# Altium PCB Attempt 2 - ClassD.PcbDoc (part 1 of 2)
Units mm, origin at the board's own origin, x right, y up, seen from the top; angles counter-clockwise.
Board outline 106 x 65 mm, 2 copper layers (Top Layer, Bottom Layer), stack 1.569 mm thick; 59 components, 29 nets, 154 pads, 172 vias.
Unrouted connection lines stored in the file: 2.
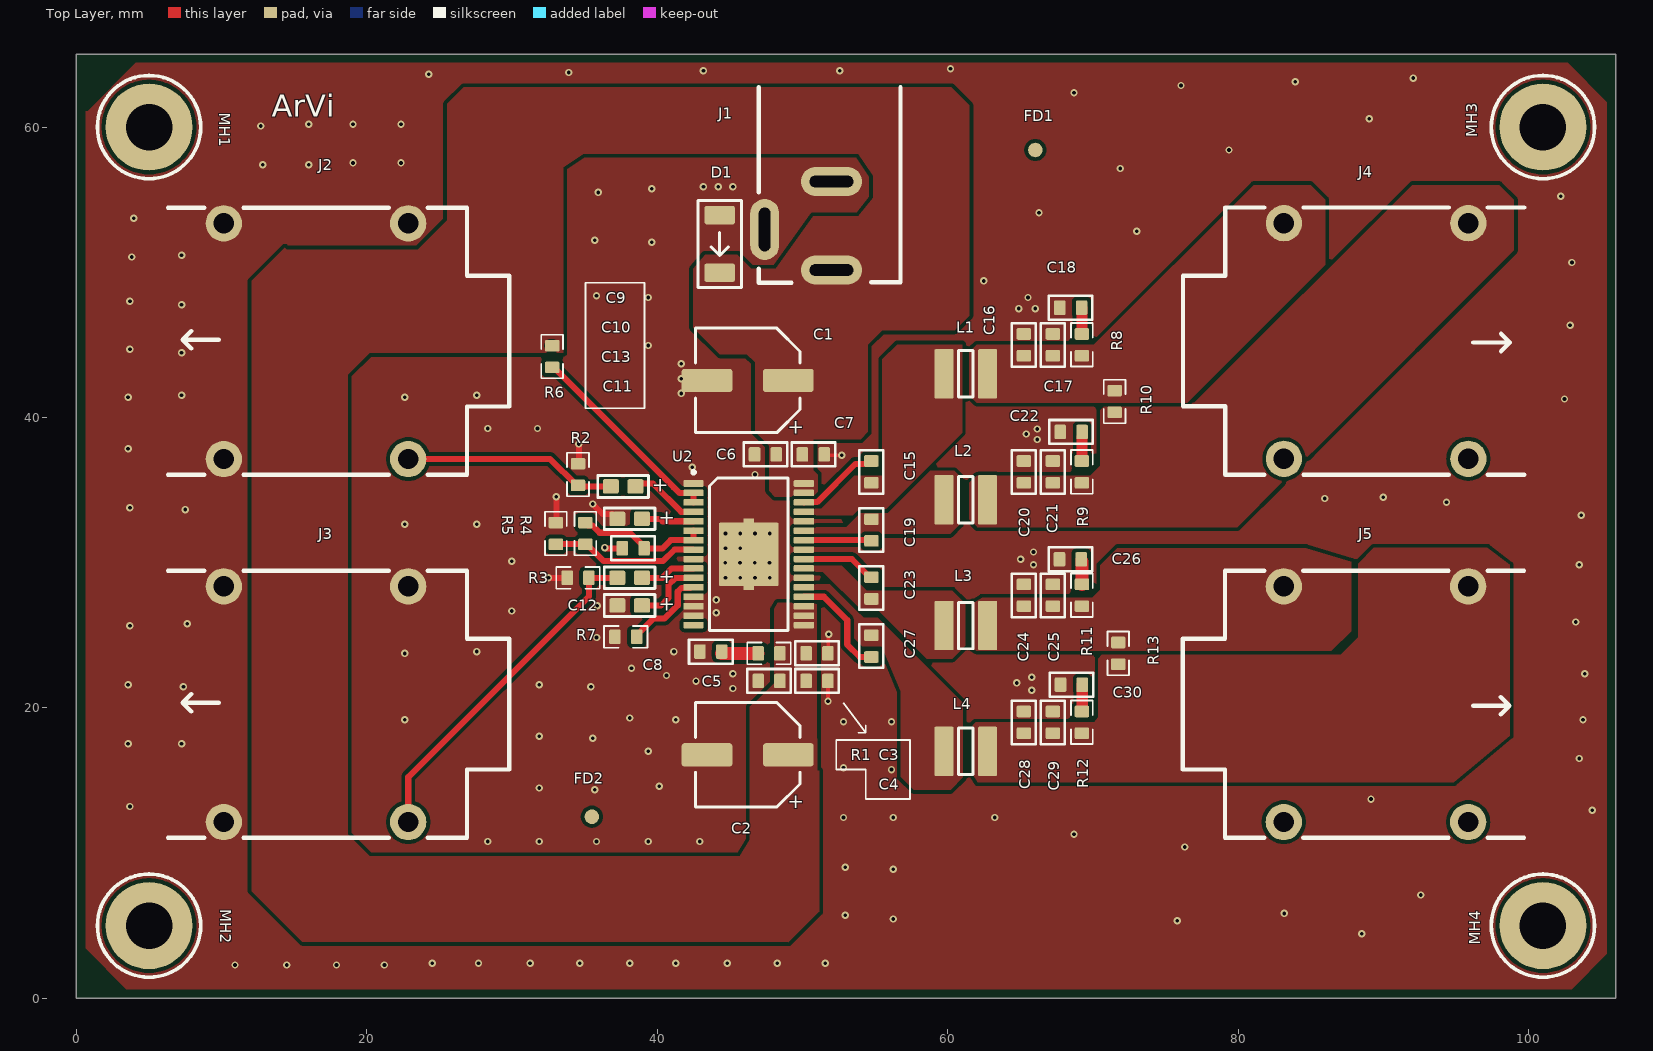
[diagram p0: Top Layer view]
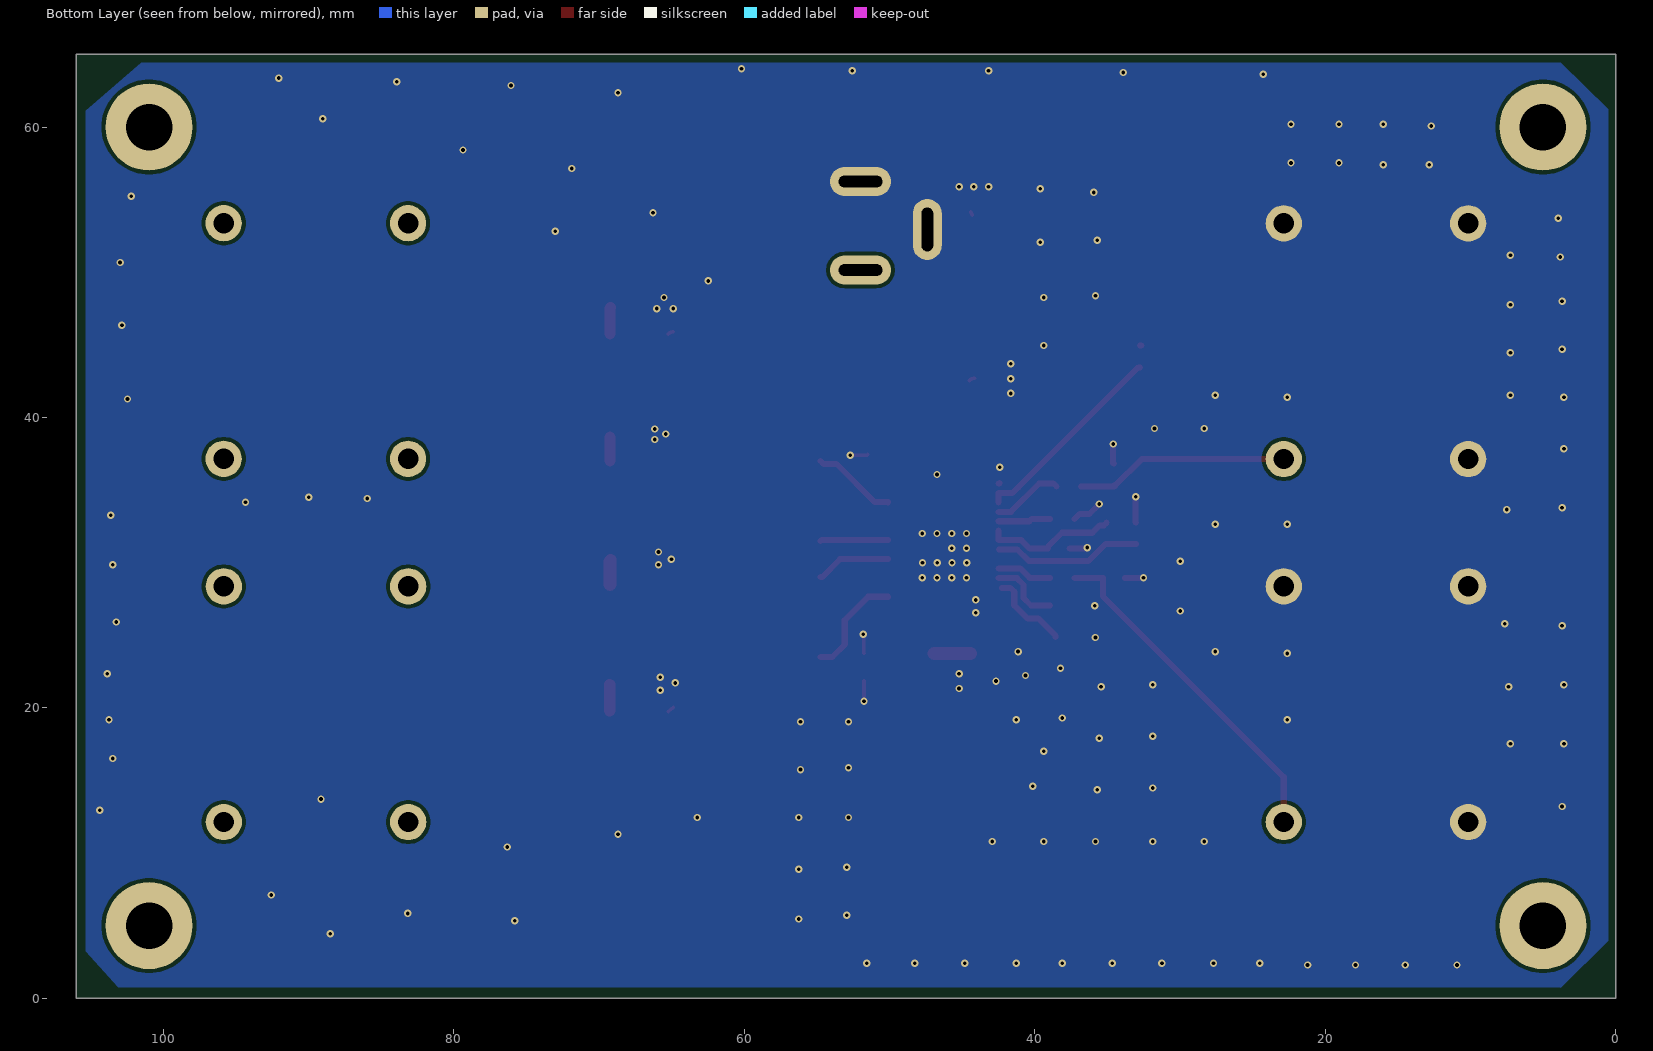
[diagram p1: Bottom Layer view, seen from below]
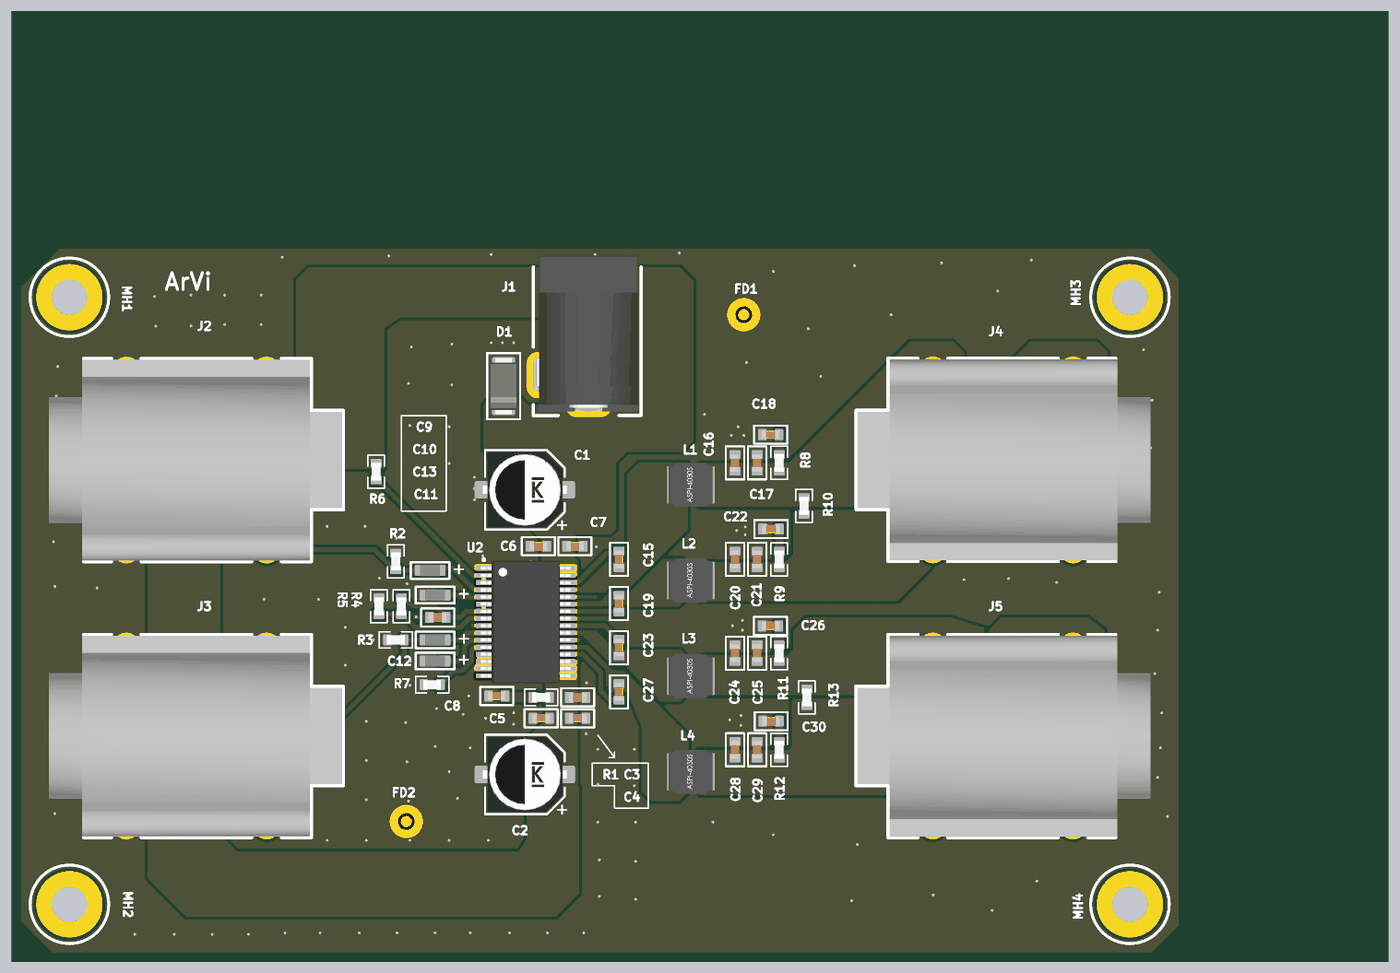
[diagram p3: 3D render of the assembled board from above, using the file's embedded part models]

## Layer stack, top to bottom
Top Solder: solder mask 0.0254, SM-001, Dk 4
Top Layer: signal copper 0.035
Dielectric 1: core 1.4986, Core-043, Dk 4.3
Bottom Layer: signal copper 0.035
Bottom Solder: solder mask 0.0254, SM-001, Dk 4

## Board outline
0,0 0,65 106,65 106,0

## Design rules (kind name [scope] priority, off if disabled: settings)
BoardOutlineClearance [All] p1: gap=0.508 ignorepadtopadclearanceinfootprint=FALSE
Clearance [All] p1: gap=0.254 ignorepadtopadclearanceinfootprint=FALSE except(0: Arc-Hole Track-Hole SMDPad-Hole THPad-Hole Via-Hole Fill-Hole Poly-Hole Region-Hole Text-Hole; 0.178: Arc-SMDPad Track-SMDPad SMDPad-SMDPad; 0.229: Arc-Arc Arc-Track Track-Track)
HoleSize [All] p1: absolutevalues=TRUE maxlimit=2286 minlimit=0.025 maxpercent=80.000 minpercent=20.000
PlaneConnect [All] p1: planeconnectstyle=Direct reliefexpansion=0.508 reliefentries=4 reliefconductorwidth=0.254 reliefairgap=0.254
PolygonConnect PolygonConnect_via [IsVia] p1: connectstyle=Direct reliefconductorwidth=0.254 reliefentries=4 polygonreliefangle="90 Angle" airgapwidth=0.254
PolygonConnect [All] p2: connectstyle=Direct reliefconductorwidth=0.254 reliefentries=4 polygonreliefangle="90 Angle" airgapwidth=0.254
RoutingVias [All] p1: holewidth=0.254 width=0.508 viastyle="Through Hole" minholewidth=0.254 minwidth=0.508 maxholewidth=0.254 maxwidth=0.508
SilkToSolderMaskClearance [IsPad] p1: minsilkscreentomaskgap=0.127 clearancetoexposedcopper=TRUE
SolderMaskExpansion [IsVia] p1: expansion=0.102 istentingtop=TRUE useseparateexpansions=TRUE expansionbottom=0.102 istentingbottom=TRUE
Width [All] p1: maxlimit=1.27 minlimit=0.254 preferedwidth=0.254
27 further rules are at their usual default settings.

## Components (designator, comment, footprint, x,y, rotation, side; value= is the part's Value field where it differs from the comment)
C1 "220u" CAP_AE_SMD_D6MM3_H8MM 46.228,42.55 r180 top
C2 "220u" CAP_AE_SMD_D6MM3_H8MM 46.228,16.764 r180 top
C3 "220n" CAP_0603 51,23.75 r180 top
C4 "220n" CAP_0603 51,21.85 r180 top
C5 "220n" CAP_0603 47.7,21.85 r0 top
C6 "220n" CAP_0603 47.45,37.45 r0 top
C7 "220n" CAP_0603 50.75,37.45 r180 top
C8 "220n" CAP_0603 43.688,23.876 r0 top
C9 "1u" CAP_TANT_0603 37.65,35.25 r180 top
C10 "1u" CAP_TANT_0603 38.1,33.02 r180 top
C11 "1u" CAP_TANT_0603 38.1,28.956 r180 top
C12 "1u" CAP_TANT_0603 38.1,27.051 r180 top
C13 "1u" CAP_0603 38.342,30.988 r180 top
C15 "220n" CAP_0603 54.75,36.25 r90 top
C16 "1u" CAP_0603 65.25,45 r90 top
C17 "1n" CAP_0603 67.25,45 r90 top
C18 "10n" CAP_0603 68.474,47.557 r180 top
C19 "220n" CAP_0603 54.75,32.25 r270 top
C20 "1u" CAP_0603 65.25,36.25 r270 top
C21 "1n" CAP_0603 67.25,36.25 r270 top
C22 "10n" CAP_0603 68.508,38.999 r0 top
C23 "220n" CAP_0603 54.75,28.25 r90 top
C24 "1u" CAP_0603 65.25,27.75 r90 top
C25 "1n" CAP_0603 67.25,27.75 r90 top
C26 "10n" CAP_0603 68.453,30.226 r180 top
C27 "220n" CAP_0603 54.75,24.25 r270 top
C28 "1u" CAP_0603 65.25,19 r270 top
C29 "1n" CAP_0603 67.25,19 r270 top
C30 "10n" CAP_0603 68.523,21.593 r0 top
D1 "D_SMA" "DO-214AC-2 (SMA)" 44.3,51.95 r270 top
FD1 "FD" FIDUCIAL 66.04,58.42 r0 top
FD2 "FD" FIDUCIAL 35.5,12.5 r0 top
J1 "CON-SOCJ-2155" CON-SOCJ-2155 52,56.25 r180 top
J2 "NMJ4HCD2" NMJ4HCD2 16.5,45.25 r180 top
J3 "NMJ4HCD2" NMJ4HCD2 16.5,20.25 r180 top
J4 "NMJ4HCD2" NMJ4HCD2 89.51,45.263 r0 top
J5 "NMJ4HCD2" NMJ4HCD2 89.5,20.25 r0 top
L1 "10u" ASPI-4030S 61.25,43 r0 top
L2 "10u" ASPI-4030S 61.25,34.333 r0 top
L3 "10u" ASPI-4030S 61.25,25.667 r0 top
L4 "10u" ASPI-4030S 61.25,17 r0 top
MH1 "MH" MH-M3 5,60 r90 top
MH2 "MH" MH-M3 5,5 r90 top
MH3 "MH" MH-M3 101,60 r90 top
MH4 "MH" MH-M3 101,5 r90 top
R1 "3R3" RES_0603 47.7,23.75 r0 top
R2 "47k" RES_0603 34.544,36.068 r270 top
R3 "47k" RES_0603 34.544,28.956 r0 top
R4 "47k" RES_0603 35.052,32.004 r270 top
R5 "5k6" RES_0603 33.02,32.004 r90 top
R6 "47k" RES_0603 32.766,44.196 r270 top
R7 "47k" RES_0603 37.834,24.892 r180 top
R8 "3R3" RES_0603 69.25,45 r270 top
R9 "3R3" RES_0603 69.25,36.25 r90 top
R10 "47k" RES_0603 71.5,41.1 r90 top
R11 "3R3" RES_0603 69.25,27.75 r270 top
R12 "3R3" RES_0603 69.25,19 r90 top
R13 "47k" RES_0603 71.75,23.75 r90 top
U2 "TPA3130D2DAPR" TSSOP32-DAP 46.3,30.575 r0 top

## Footprints (in the part's own frame and the unit in brackets; to place one, negate y for a bottom-side part, rotate by r counter-clockwise, add the part's x,y. Pads: shape width x height; smd on the part's side, far side on the other; paste and mask are expansions set on the pad)
ASPI-4030S [mm]
  rrect10% 1.3x3.4 smd: 1(-1.5,0) 2(1.5,0)
  silkscreen extent -0.5,-1.6 0.5,1.6, body extent -2,-2 2,2, height 3.01
CAP_0603 [mm]
  rrect25% 0.8x1 smd: 1(-0.75,0) 2(0.75,0)
  silkscreen extent -1.5,-0.82 1.5,0.82, body extent -0.8,-0.4 0.8,0.4, height 0.51
CAP_AE_SMD_D6MM3_H8MM [mm]
  rrect25% 3.5x1.6 smd: 1(-2.8,0) 2(2.8,0)
  silkscreen extent -3.6,-3.6 3.6,3.6, body extent -3.8,-3.4 3.8,3.4, height 8.02
CAP_TANT_0603 [mm]
  rrect25% 1.1x1 smd: A(-0.85,0) K(0.85,0)
  silkscreen extent -1.75,-0.75 1.75,0.75, body extent -0.9,-0.53 0.9,0.53, height 0.91
CON-SOCJ-2155 [mm]
  oval 4.2x2 hole 0.8 slot 3 at 0 deg: 1(0,6.1) 2(0,0)
  oval 2x4.2 hole 0.8 slot 3 at 90 deg: 3(4.6,3.3)
  silkscreen extent -4.75,-6.5 5,6.98, body extent -4.5,-7.5 4.75,6.6, height 11.11
"DO-214AC-2 (SMA)" [mm]
  rrect25% 1.27x2.1 smd: A(-1.985,0) K(1.985,0)
  silkscreen extent -3,-1.5 3,1.5, body extent -2.6,-1.3 2.6,1.3, height 2.42
FIDUCIAL [mm] "Fiducial"
  round 1 smd paste-1 mask+1: FM(0,0)
MH-M3 [mm] "Mounting Hole"
  round 6 hole 3.2: MH(0,0)
  silkscreen extent -3.55,-3.55 3.55,3.55
NMJ4HCD2 [mm]
  round 2.5 hole 1.4: S(6.35,8.115) SN(6.35,-8.115) T(-6.35,8.115) TN(-6.35,-8.115)
  silkscreen extent -13.3,-9.2 10.2,9.2, body extent -13.18,-9.1 13.35,9.1, height 15.68
RES_0603 [mm]
  rrect25% 0.8x1 smd: 1(-0.75,0) 2(0.75,0)
  silkscreen extent -1.5,-0.75 1.5,0.75, body extent -0.8,-0.43 0.8,0.43, height 0.52
TSSOP32-DAP [mm] "TSOP, 32-Leads, Body 11.00x6.10mm, Pitch 0.65mm, IPC Medium Density"
  rrect25% 1.4x0.45 smd mask+0.14: 1(-3.8,4.875) 2(-3.8,4.225) 3(-3.8,3.575) 4(-3.8,2.925) 5(-3.8,2.275) 6(-3.8,1.625) 7(-3.8,0.975) 8(-3.8,0.325) 9(-3.8,-0.325) 10(-3.8,-0.975) 11(-3.8,-1.625) 12(-3.8,-2.275) 13(-3.8,-2.925) 14(-3.8,-3.575) 15(-3.8,-4.225) 16(-3.8,-4.875) 17(3.8,-4.875) 18(3.8,-4.225) 19(3.8,-3.575) 20(3.8,-2.925) 21(3.8,-2.275) 22(3.8,-1.625) 23(3.8,-0.975) 24(3.8,-0.325) 25(3.8,0.325) 26(3.8,0.975) 27(3.8,1.625) 28(3.8,2.275) 29(3.8,2.925) 30(3.8,3.575) 31(3.8,4.225) 32(3.8,4.875)
  rrect5% 0.7x0.3 smd mask+0.14: 33(0,-2.325) 33(0,2.325)
  rrect5% 4.11x4.36 smd mask+0.14: 33(0,0)
  silkscreen extent -3.9,-5.25 2.7,5.75, body extent -4.05,-5.55 4.05,5.55, height 1.15

## Part data
C1 C2: library part CAP_ALEL_D6MM3_H8MM, "Capacitor SMD Aluminium Electrolytic 6.3mm Diameter 8mm Height", LCSC=C340768, Manufacturer=Nichicon, Manufacturer Part Number=UCM1E221MCL1GS, Distributor Link=https://www.lcsc.com/product-detail/Aluminum-Electrolytic-Capacitors-SMD_Nichicon-UCM1E221MCL1GS_C340768.html
C3 C4 C5 C6 C7 C8 C15 C19 C23 C27: library part CAP_0603, "Capacitor SMD 0603", LCSC=C21120, Manufacturer=Samsung, Manufacturer Part Number=CL10B224KA8NNNC, Rating=25V, Distributor Link=https://www.lcsc.com/product-detail/Multilayer-Ceramic-Capacitors-MLCC-SMD-SMT_Samsung-Electro-Mechanics-CL10B224KA8NNNC_C21120.html
C9 C10 C11 C12: library part CAP_TANT_0603, "Capacitor SMD Tantalum 0603", LCSC=C1952840, Manufacturer=Vishay, Manufacturer Part Number=298D105X0025M2T, Distributor Link=https://www.lcsc.com/product-detail/Tantalum-Capacitors_Vishay-Intertech-298D105X0025M2T_C1952840.html
C13 C16 C20 C24 C28: library part CAP_0603_1, "Capacitor SMD 0603", LCSC=C15849, Manufacturer=Samsung, Manufacturer Part Number=CL10A105KB8NNNC, Rating=50V, Distributor Link=https://www.lcsc.com/product-detail/Multilayer-Ceramic-Capacitors-MLCC-SMD-SMT_Samsung-Electro-Mechanics-CL10A105KB8NNNC_C15849.html
C17 C21 C25 C29: library part CAP_0603_2, "Capacitor SMD 0603", LCSC=C1588, Manufacturer=Samsung, Manufacturer Part Number=CL10B102KB8NNNC, Rating=50V, Distributor Link=https://www.lcsc.com/product-detail/Multilayer-Ceramic-Capacitors-MLCC-SMD-SMT_Samsung-Electro-Mechanics-CL10B102KB8NNNC_C1588.html
C18 C22 C26 C30: library part CAP_0603_3, "Capacitor SMD 0603", LCSC=C57112, Manufacturer=FH, Manufacturer Part Number=0603B103K500NT, Rating=50V, Distributor Link=https://www.lcsc.com/product-detail/Multilayer-Ceramic-Capacitors-MLCC-SMD-SMT_FH-Guangdong-Fenghua-Advanced-Tech-0603B103K500NT_C57112.html
D1: "Diode SMD SMA (DO-214AA)"
FD1 FD2: "Fidicuial"
J1: "DC Barrell Jack 2.1mm 30V 2.5A THT", Manufacturer=Gravitech, Distributor Link=https://www.mouser.de/ProductDetail/Gravitech/CON-SOCJ-2155?qs=fkzBJ5HM%252BdCcpvFQyQZHtA%3D%3D&_gl=1*ni0d5y*_ga*MjU5MDE1MzgyLjE2NTQ4NDcxMjU.*_ga_15W4STQT4T*MTY5Njc2NjEwNi4yNTkuMS4xNjk2NzY2MTE4LjQ4LjAuMA..*_ga_1KQLCYKRX3*MTY5NTYzNTI2NS4xODkuMS4xNjk1NjM1MjcxLjU0LjAuMA.., Manufacturer Part Number=CON-SOCJ-2155
J2 J3 J4 J5: "1/4\" Mono Jack, TS Switched", Manufacturer=Neutrik, Distributor Link=https://www.mouser.de/ProductDetail/Neutrik/NMJ4HCD2?qs=SzdD80gJ2cAr9Xh3wJi7nw%3D%3D, Manufacturer Part Number=NMJ4HCD2
L1 L2 L3 L4: library part ASPI-4030S, "Power Inductor SMD ASPI-4030S Series", LCSC=C2050513, Manufacturer=ABRACON, Manufacturer Part Number=ASPI-4030S-100M-T, Distributor Link=https://www.lcsc.com/product-detail/Power-Inductors_Abracon-LLC-ASPI-4030S-100M-T_C2050513.html
MH1 MH2 MH3 MH4: library part MH-M3, "Mounting Hole M3"
R1 R8 R9 R11 R12: library part RES_0603_1, "Resistor SMD 0603", LCSC=C137627, Manufacturer=YAGEO, Manufacturer Part Number=RC0603JR-073R3L, Distributor Link=https://www.lcsc.com/product-detail/Chip-Resistor-Surface-Mount_YAGEO-RC0603JR-073R3L_C137627.html
R2 R3 R4 R6 R7 R10 R13: library part RES_0603, "Resistor SMD 0603", LCSC=C25819, Manufacturer=UNI-ROYAL, Manufacturer Part Number=0603WAF4702T5E, Distributor Link=https://www.lcsc.com/product-detail/Chip-Resistor-Surface-Mount_UNI-ROYAL-Uniroyal-Elec-0603WAF4702T5E_C25819.html
R5: library part RES_0603_2, "Resistor SMD 0603", LCSC=C23189, Manufacturer=UNI-ROYAL, Manufacturer Part Number=0603WAF5601T5E, Distributor Link=https://www.lcsc.com/product-detail/Chip-Resistor-Surface-Mount_UNI-ROYAL-Uniroyal-Elec-0603WAF5601T5E_C23189.html
U2: "2x15W Filter-Free Class-D Stereo Amplifier With AM Avoidance", LCSC=C95206, Manufacturer="Texas Instruments", Distributor Link=https://www.lcsc.com/product-detail/Audio-Power-OpAmps_Texas-Instruments-TPA3130D2DAPR_C95206.html, Manufacturer Part Number=TPA3130D2DAPR

## Via types
v1: diameter 0.508, hole 0.254, Top Layer to Bottom Layer, tented both sides, 172 vias

## Nets (pads, with @x,y where several pads share a name; then routed paths per layer and width w, separated by ;. In a path a pad name is that pad's centre, name@x,y a point inside that pad or via, vN(x,y) a via of type N, cw(c..) or ccw(c..) an arc to the next point about the centre after c; other vN are vias at no path point)
15V_RC: C8.2 R1.1 | length 2.5
  Top Layer w0.889: C8.2@44.438,23.75 R1.1@46.95,23.75
+15V: C1.1 C2.1 C3.2 C4.2 C5.2 C6.2 C7.2 D1.K J1.1 R1.2 R6.1 U2.17 U2.18 U2.19 U2.31 U2.32 | length 0.1
  Top Layer w0.417: R6.1@32.666,44.946 R6.1@32.766,44.946
FAULTZ_SDZ: R6.2 U2.2 U2.3 | length 14
  Top Layer w0.417: R6.2@32.766,43.446 32.866,43.446 41.133,35.179 41.148,35.179 41.527,34.8 U2.2@42.5,34.8 U2.3@42.5,34.15
GAIN_SLV: R4.2 R5.1 U2.8 | length 10.3
  Top Layer w0.417: R5.1@33.037,31.271 35.141,31.271 35.141,31.265 35.344,31.062 35.35,31.062 35.663,30.749 35.663,30.741 36.303,30.102 40.391,30.102 41.189,30.9 U2.8@42.473,30.9
GND: C1.2 C2.2 C3.1 C4.1 C5.1 C6.1 C7.1 C8.1 C10.K C12.K C13.2 C16.2 C17.2 C18.2 C20.1 C21.1 C22.1 C24.2 C25.2 C26.2 C28.1 C29.1 C30.1 D1.A J1.2 J1.3 J2.S J2.SN J2.TN J3.S J3.SN J3.TN R2.1 R3.1 R5.2 R7.2 U2.1 U2.9 U2.13 U2.14 U2.15 U2.22 U2.25 U2.28 U2.33 | length 13.5
  Top Layer w0.254: J2.S@10.15,37.135 J2.S@10.18,37.105 ; C1.2@44.138,42.7 cw(c44.138,42.188) C1.2@44.5,42.55 ; D1.A@44.3,53.935 ccw(c44.059,54.176) D1.A@44.4,54.176 ; C7.1@51.5,37.45 51.55,37.4 v1(52.7,37.4) ; C4.1@51.75,21.85 51.757,21.843 51.757,20.46 v1(51.764,20.453) ; C3.1@51.75,23.75 51.781,23.781 51.781,25.031 v1(51.813,25.063) ; J1.2@52,56.25 J1.2@52.07,56.18 ; C16.2@64.888,45.9 cw(c64.888,45.388) C16.2@65.25,45.75 ; C28.1@64.9,20.023 C28.1@65.25,19.75
  Top Layer w0.417: v1(32.512,28.956) R3.1@33.794,28.956 ; R5.2@33.02,32.754 33.048,32.782 v1(33.048,34.548) ; R2.1@34.544,36.818 34.604,36.878 v1(34.604,38.168) ; v1(35.56,34.036) 36.232,33.364 36.906,33.364 C10.K@37.25,33.02 ; v1(36.38,31.038) ccw(c36.5,31.159) 36.5,30.988 C13.2@37.592,30.988 ; U2.1@42.418,35.467 42.435,35.45 U2.1@42.5,35.45
  other v1: 10.922,2.286 14.478,2.286 17.907,2.286 21.209,2.286 24.511,2.413 27.686,2.413 31.242,2.413 34.671,2.413 38.1,2.413 41.275,2.413 44.831,2.413 48.26,2.413 51.562,2.413 88.519,4.445 75.819,5.334 56.261,5.461 52.959,5.715 83.185,5.842 92.583,7.112 56.261,8.89 52.959,9.017 76.327,10.414 28.321,10.795 31.877,10.795 35.814,10.795 39.37,10.795 42.926,10.795 68.707,11.303 52.832,12.446 56.261,12.446 63.246,12.446 104.394,12.954 3.683,13.208 89.154,13.716 35.687,14.351 31.877,14.478 40.132,14.605 56.134,15.748 52.832,15.875 103.505,16.51 39.37,17.018 3.556,17.526 7.239,17.526 35.56,17.907 31.877,18.034 52.832,19.05 56.134,19.05 22.606,19.177 41.275,19.177 103.759,19.177 38.1,19.304 65.786,21.209 45.212,21.336 7.366,21.463 35.433,21.463 3.556,21.59 31.877,21.59 64.77,21.717 42.672,21.844 65.786,22.098 40.64,22.225 45.212,22.352 103.886,22.352 38.227,22.733 22.606,23.749 27.559,23.876 41.148,23.876 35.822,24.842 3.683,25.654 7.62,25.781 103.251,25.908 44.069,26.543 29.972,26.67 35.875,27.03 44.069,27.432 44.704,28.956 45.72,28.956 46.736,28.956 47.752,28.956 65.913,29.845 103.505,29.845 44.686,30.003 45.702,30.003 46.718,30.003 47.734,30.003 29.972,30.099 65.024,30.226 65.913,30.734 44.704,30.988 45.72,30.988 44.704,32.004 45.72,32.004 46.736,32.004 47.752,32.004 22.606,32.639 27.559,32.639 103.632,33.274 7.493,33.655 3.683,33.782 94.361,34.163 85.979,34.417 90,34.5 46.736,36.068 42.418,36.576 3.556,37.846 66.167,38.481 65.405,38.862 66.174,39.205 28.321,39.243 31.75,39.243 102.489,41.275 3.556,41.402 22.606,41.402 7.239,41.529 27.559,41.529 41.656,41.656 41.656,42.672 41.656,43.688 7.239,44.45 3.683,44.704 39.37,44.958 102.87,46.355 64.897,47.498 66.04,47.498 7.239,47.752 3.683,48.006 39.37,48.26 65.532,48.26 35.814,48.387 62.484,49.403 102.997,50.673 3.81,51.054 7.239,51.181 39.624,52.07 35.687,52.197 73.025,52.832 3.937,53.721 66.294,54.102 102.235,55.245 35.941,55.499 39.624,55.753 43.18,55.88 44.196,55.88 45.212,55.88 71.882,57.15 12.827,57.404 16.002,57.404 19.05,57.531 22.352,57.531 79.375,58.42 12.7,60.071 16.002,60.198 19.05,60.198 22.352,60.198 89.027,60.579 68.707,62.357 76.073,62.865 83.947,63.119 92.075,63.373 24.257,63.627 33.909,63.754 43.18,63.881 52.578,63.881 60.198,64.008
GVDD_PLIM: C13.1 R4.1 U2.6 U2.7 | length 9.1
  Top Layer w0.417: R4.1@35.052,32.754 35.244,32.562 35.526,32.562 36.03,32.058 38.122,32.058 39.092,31.088 C13.1@39.092,30.988 40.365,30.988 40.927,31.55 U2.7@42.5,31.55 U2.6@42.5,32.2
IN.L: C11.K J3.T R3.2 | length 23.9
  Top Layer w0.417: J3.T@22.85,12.135 22.85,15.23 35.306,27.686 35.306,28.944 R3.2@35.294,28.956 C11.K@37.25,28.956
IN.L_AC: C11.A U2.10 | length 3.8
  Top Layer w0.417: C11.A@38.95,28.956 40.35,28.956 40.994,29.6 U2.10@42.5,29.6
IN.L_AC_N: C12.A U2.11 | length 4.9
  Top Layer w0.417: C12.A@38.95,27.051 40.259,27.051 40.767,27.559 40.767,28.461 41.24,28.933 42.483,28.933 U2.11@42.5,28.95
IN.R: C9.K J2.T R2.2 | length 14.7
  Top Layer w0.417: J2.T@22.85,37.135 32.627,37.135 34.444,35.318 R2.2@34.544,35.318 ; R2.2@34.512,35.25 C9.K@36.8,35.25
IN.R_AC: C9.A U2.4 | length 4.9
  Top Layer w0.417: C9.A@38.5,35.25 38.703,35.453 39.695,35.453 41.647,33.5 U2.4@42.5,33.5
IN.R_AC_N: C10.A U2.5 | length 3.6
  Top Layer w0.417: C10.A@38.95,33.02 40.2,33.02 40.37,32.85 U2.5@42.5,32.85
MUTE: R7.1 U2.12 | length 5.7
  Top Layer w0.417: R7.1@38.584,24.892 38.584,24.992 39.754,26.162 40.513,26.162 41.412,27.061 41.412,28 41.673,28.261 U2.12@42.271,28.261
OUT.L_BS_N: C27.2 U2.20 | length 7.4
  Top Layer w0.417: U2.20@50.1,27.65 51.471,27.65 53.086,26.035 53.086,24.355 53.941,23.5 C27.2@54.75,23.5
OUT.L_BS_P: C23.2 U2.24 | length 5.2
  Top Layer w0.417: U2.24@50.1,30.25 53.4,30.25 54.65,29 C23.2@54.75,29
OUT.L_L_N: C27.1 L4.1 U2.21
OUT.L_L_P: C23.1 L3.1 U2.23
OUT.L_N: C28.2 C29.2 J5.S L4.2 R12.1 R13.1
OUT.L_N_RC: C30.2 R12.2 | length 2.2
  Top Layer w0.254: R12.2@69,20 R12.2@69.25,19.75 R12.2@69.273,19.773
  Top Layer w0.762: R12.2@69.273,19.773 C30.2@69.273,21.593
OUT.L_P: C24.1 C25.1 J5.T L3.2 R11.2 R13.2
OUT.L_P_RC: C26.1 R11.1 | length 1.7
  Top Layer w0.762: C26.1@69.203,30.226 69.203,30.126 C26.1@69.25,30.079
  Top Layer w0.889: R11.1@69.25,28.5 C26.1@69.25,30.079
OUT.R_BS_N: C19.2 U2.26 | length 4.7
  Top Layer w0.417: U2.26@50.1,31.55 54.7,31.55 C19.2@54.75,31.5
OUT.R_BS_P: C15.2 U2.30 | length 5.8
  Top Layer w0.417: U2.30@50.1,34.15 50.1,34.171 51.016,34.171 53.654,36.808 54.558,36.808 C15.2@54.75,37
OUT.R_L_N: C19.1 L2.1 U2.27
OUT.R_L_P: C15.1 L1.1 U2.29
OUT.R_N: C20.2 C21.2 J4.S L2.2 R9.1 R10.1
OUT.R_N_RC: C22.2 R9.2 | length 1.7
  Top Layer w0.762: R9.2@69.25,37 C22.2@69.25,38.65
OUT.R_P: C16.1 C17.1 J4.T L1.2 R8.2 R10.2
OUT.R_P_RC: C18.1 R8.1 | length 1.8
  Top Layer w0.762: C18.1@69.224,47.557 69.243,47.538 69.243,47.3 69.25,47.293 R8.1@69.25,45.75
pads on no net: FD1.FM FD2.FM J4.SN J4.TN J5.SN J5.TN MH1.MH MH2.MH MH3.MH MH4.MH U2.16

## Polygon pours and split planes (outlines as drawn)
OUT.L_L_P on Top Layer "OUT.L_L_P" (solid, pour order 76): 49.456,29.825 52.675,29.825 54.433,28.067 60.325,28.067 61.217,27.175 61.217,24.26 60.325,23.368 58.547,23.368 55.245,26.67 54.102,26.67 51.397,29.375 49.456,29.375 49.4,29.431 49.4,29.769
OUT.L_P on Top Layer "OUT.L.P" (solid, pour order 44): 73.914,23.927 86.427,23.927 87.783,25.283 87.783,30.069 84.716,31 71.691,31 70.51,29.82 70.51,28.143 69.952,27.584 63.449,27.584 62.382,27.584 61.861,27.267 61.75,27.267 61.75,24.31 61.75,24.067 61.976,23.927
OUT.L_N on Top Layer "OUT.L.N" (solid, pour order 46): 70.612,23.673 87.071,23.673 88.265,24.867 88.265,29.918 89.357,31.01 97.18,31.01 98.704,29.84 98.704,26.834 98.704,18.087 94.861,14.884 74.93,14.884 62.078,14.884 61.722,15.428 61.722,18.796 61.925,18.999 70.105,18.999 70.372,19.341 70.372,23.368
+15V on Top Layer "Top Layer-+15V" (solid, pour order 83): 50.749,38.506 50.756,38.5 54,38.5 54.5,39 54.5,45 55.5,46 60.5,46 61.5,47 61.5,61.5 60.262,62.738 26.67,62.738 25.527,61.595 25.527,53.594 23.495,51.562 14.478,51.562 14.351,51.689 12.065,49.403 12.065,7.366 15.546,3.885 49.005,3.885 49.033,3.857 51.125,5.948 51.146,5.948 51.146,15.656 51.003,15.656 51.003,17.882 51,17.885 51,27.124 51.003,27.127 50.902,27.229 48.314,27.229 48.05,26.833 48.05,21.685 46.787,20.422 46.584,20.269 46.38,20.066 46.38,10.912 45.672,9.779 20.193,9.779 18.669,11.303 18.669,42.926 20.193,44.45 33.528,44.45 33.528,57.219 34.925,58.166 53.848,58.166 54.864,56.642 54.864,55.118 53.848,53.848 50.749,53.848 48.158,50.241 46.482,50.241 45.517,51.206 43.307,51.206 42.469,50.241 42.469,46.181 44.302,44.348 46.177,44.348 46.736,43.79 46.736,39.024 47.701,38.059 47.701,34.95 48.108,34.544 50.851,34.544 51.054,34.747 51.054,36.068 50.749,36.373
GND on Top Layer "Top Layer-GND" (solid, remove dead copper, pour order 84): 0.635,3.429 3.429,0.635 102.997,0.635 105.41,3.048 105.41,61.722 102.718,64.414 4.089,64.414 0.762,61.087 0.635,61.087
OUT.R_L_N on Top Layer "OUT.R_L_N" (solid, pour order 72): 49.456,31.975 60.169,31.975 60.833,32.639 60.833,35.941 60.452,36.322 58.801,36.322 55.875,33.396 53.97,33.396 53.019,32.445 49.476,32.445 49.4,32.369 49.4,32.031
OUT.L_L_N on Top Layer "OUT.L_L_N" (solid, pour order 78): 49.456,28.525 49.468,28.513 51.917,28.513 54.217,26.213 55.194,26.213 61.053,20.354 61.053,15.206 60.198,14.351 57.658,14.351 56.769,15.24 56.769,21.138 55.477,24.257 54.102,24.257 53.467,24.892 53.467,26.213 51.589,28.091 49.44,28.091 49.4,28.131 49.4,28.469
OUT.R_P on Top Layer "OUT.R_P_L01_P079" (solid, pour order 79): 62,45 70.075,45 81.075,56 85,56 86,55 86,50.5 76.5,41 62,41 61.5,41.5 61.5,44.5
OUT.R_N on Top Layer "OUT.R_N_L01_P080" (solid, pour order 80): 62,36 69.825,36 70.5,36.675 70.5,40.5 71,41 77,41 92,56 98,56 99,55 99,51.5 79.95,32.45 62.043,32.45 62.043,32.457 61.5,33 61.5,35.5
OUT.R_L_P on Top Layer "OUT.R_L_P_L01_P082" (solid, pour order 82): 49.468,33.264 53.639,33.264 54.095,33.719 55.769,33.719 55.769,33.729 60.993,38.953 60.993,45.023 56.523,45.023 55.5,44 55.5,36 53.569,36 51.29,33.721 51.286,33.725 49.456,33.725 49.4,33.669 49.4,33.331
GND on Bottom Layer "GND" (solid, pour order 36): 4.42,64.414 101.549,64.414 105.359,61.112 105.359,3.302 105.359,3.251 103.124,0.762 3.759,0.711 0.305,4.166 0.305,61.011 3.759,64.414

## Silkscreen, mask and mechanical layers (free items; w line width, h text height)
Top Overlay:
  lines w0.125: 52.832,20.32 54.356,18.288 ; 53.848,18.288 54.356,18.288 ; 54.356,18.796 54.356,18.288 ; 35.052,40.64 35.052,49.276 39.116,49.276 39.116,40.64 35.052,40.64 ; 52.324,15.748 52.324,17.78 57.404,17.78 57.404,13.716 54.356,13.716 54.356,15.748 52.324,15.748
  text "ArVi" at 13.462,60.706 h1.52
dimensions:
  text "ALL Four" at 108.605,70.676 h1.52
  text "ALL Four" at 118.415,61.637 h1.52
  text "ALL Four" at 106.971,9.466 h1.52
Board Shape:
  lines w0.125: 124.333,85.667 124.333,85.852
  lines w0.5: 0,0 106,0 106,65 0,65 0,0
layer stackup:
  drawing of 243 lines, arcs and shapes, not listed
  text "Layer" at 134.676,70.939 h1.65
  text "Name" at 145.903,70.939 h1.65
  text "Material" at 182.413,70.939 h1.65
  text "Thickness" at 204.633,70.939 h1.65
  text "Constant" at 222.456,70.939 h1.65
  text "Board Layer Stack" at 238.08,70.939 h1.65
  text "Top Overlay" at 145.903,67.64 h1.65
  text "Top Solder" at 145.903,64.341 h1.65
  text "SM-001" at 182.413,64.341 h1.65
  text "1.00mil" at 204.633,64.341 h1.65
  text "4" at 222.456,64.341 h1.65
  text "Top Surface Finish" at 145.903,61.043 h1.65
  text "Nickel, Gold" at 182.413,61.043 h1.65
  text "0.16mil" at 204.633,61.043 h1.65
  text "1" at 134.676,57.744 h1.65
  text "Top Layer" at 145.903,57.744 h1.65
  text "CF-004" at 182.413,57.744 h1.65
  text "1.38mil" at 204.633,57.744 h1.65
  text "Dielectric 1" at 145.903,54.445 h1.65
  text "Core-043" at 182.413,54.445 h1.65
  text "59.00mil" at 204.633,54.445 h1.65
  text "4.3" at 222.456,54.445 h1.65
  text "2" at 134.676,51.146 h1.65
  text "Bottom Layer" at 145.903,51.146 h1.65
  text "CF-004" at 182.413,51.146 h1.65
  text "1.38mil" at 204.633,51.146 h1.65
  text "Bottom Surface Finish" at 145.903,47.847 h1.65
  text "Nickel, Gold" at 182.413,47.847 h1.65
  text "0.16mil" at 204.633,47.847 h1.65
  text "Bottom Solder" at 145.903,44.548 h1.65
  text "SM-001" at 182.413,44.548 h1.65
  text "1.00mil" at 204.633,44.548 h1.65
  text "4" at 222.456,44.548 h1.65
  text "Bottom Overlay" at 145.903,41.249 h1.65